# Altium PCB PCB1.PcbDoc (part 2 of 2)
Units mil, origin at the board's own origin, x right, y up, seen from the top; angles counter-clockwise.
Board outline 3040.49 x 3282.62 mil, 2 copper layers (Top Layer, Bottom Layer); 59 components, 123 nets, 376 pads, 176 vias.
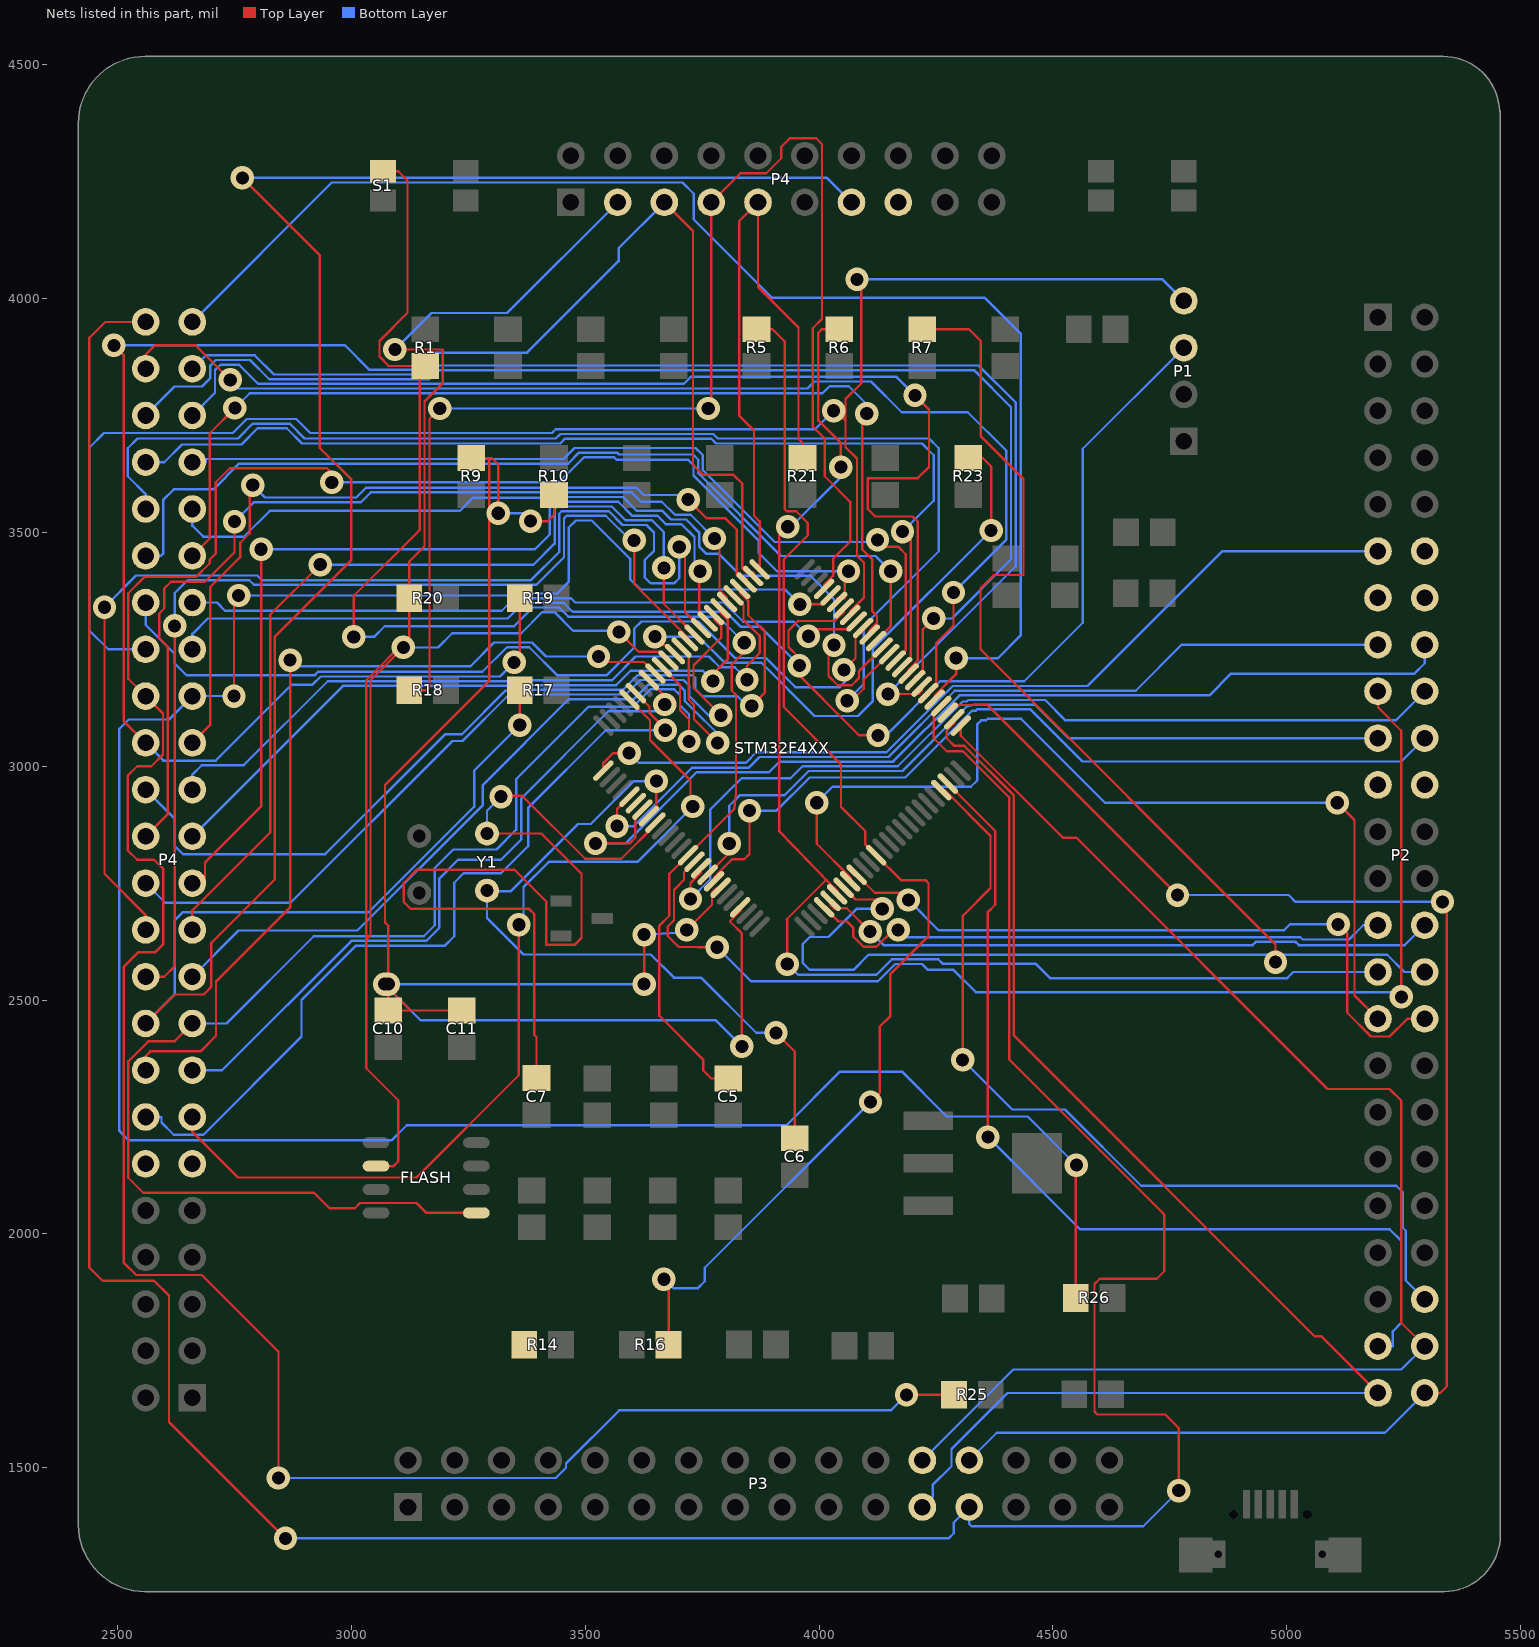
[diagram p2: the nets of this part, all layers, seen from the top]

## Via types
v1: diameter 50, hole 28, Top Layer to Bottom Layer, 172 vias
v2: diameter 177.17, hole 137.8, Top Layer to Bottom Layer, 4 vias

## Nets (pads, with @x,y where several pads share a name; then routed paths per layer and width w, separated by ;. In a path a pad name is that pad's centre, name@x,y a point inside that pad or via, vN(x,y) a via of type N, cw(c..) or ccw(c..) an arc to the next point about the centre after c; other vN are vias at no path point) (continued)
PA4: P2.27 STM32F4XX.29 | length 1266.5
  Top Layer w5: STM32F4XX.29@4010.69,2698.41 4041.26,2667.83 4060,2667.83 4072.75,2655.08 4072.75,2636.35 4095.27,2613.82 4122.92,2613.82 4159.1,2650 v1(4169.1,2650)
  Bottom Layer w5: v1(4169.1,2650) 4184.6,2634.5 5028.98,2634.5 5033.99,2629.48 5133,2629.48 5163.52,2660 P2.27@5195,2660
PA5: P2.28 STM32F4XX.30 | length 1338.3
  Top Layer w5: STM32F4XX.30@4024.61,2712.33 4024.61,2703.45 4031.74,2696.32 4059.05,2696.32 v1(4109.05,2646.32)
  Bottom Layer w5: v1(4109.05,2646.32) 4137.87,2617.5 4927.02,2617.5 4934,2624.48 5019,2624.48 5025.98,2617.5 5252.5,2617.5 P2.28@5295,2660
PA6: P2.29 R6.2 STM32F4XX.31 | length 2912
  Top Layer w5: v1(3932,2577) 3932,2674 4015.26,2757.26 4023,2749.52 ; v1(3933,3512) 3914.5,3493.5 3914.5,2861.5 4023,2749.52 ; STM32F4XX.31@4038.52,2726.25 4038.52,2734 4023,2749.52 ; R6.2@4043.43,3934.57 4006,3934.57 3998.5,3927.07 3998.5,3739 4046.65,3690.85 v1(4046.65,3639.65)
  Bottom Layer w5: v1(3932,2577) 3955,2554 4122.5,2554 4155.72,2587.22 4255,2587.22 4264.22,2578 4463,2578 4494,2547 5001,2547 5014,2560 P2.29@5195,2560 ; v1(3933,3512) 3940,3512 4046.65,3618.65 v1(4046.65,3639.65)
PA7: P2.30 R7.2 STM32F4XX.32 | length 3574.4
  Top Layer w5: STM32F4XX.32@4052.44,2740.17 4077.61,2715 4125,2715 4135,2705 v1(4135,2695) ; R7.2@4220.59,3934.57 4320,3934.57 4346,3908.57 4346,3705 4437.03,3613.97 4437.03,3409 4374,3409 4345,3380 4345,3250 4976,2619 v1(4976,2581)
  Bottom Layer w5: v1(4135,2695) 4080,2695 4020,2635 3980,2635 3965,2620 3965,2579.5 3980,2564.5 4073.45,2564.5 4106.16,2597.22 4264.82,2597.22 4265.01,2597.03 v1@4992.03,2597.03 ; v1(4976,2581) v1@4992.03,2597.03 ; P2.30@5295,2560 5252.03,2560 5215,2597.03 v1@4992.03,2597.03
PA8: P4.35 STM32F4XX.67 | length 1485.5
  Top Layer w5: v1(3977,3278) 3992,3293 4063.81,3293 STM32F4XX.67@4080.28,3309.47
  Bottom Layer w5: P4.35@2660,3350 2712.5,3350 2730,3332.5 3321.5,3332.5 3348.5,3359.5 3469,3359.5 3478.5,3350 3797,3350 3838,3309 3946,3309 v1(3977,3278)
PA9/TXD1: P1.4 P4.34 STM32F4XX.68 | length 3696.1
  Top Layer w5: v1(4031,3760) 4031,3755 4041,3755 4056.65,3739.35 ; STM32F4XX.68@4066.36,3323.39 4066.36,3331.36 4096,3361 4096,3435 4081,3450 4081,3657.69 4056.65,3682.03 4056.65,3739.35 ; v1(4081,4041) 4090.45,4031.55 4090.45,3818.95 4056.65,3785.15 4056.65,3739.35
  Bottom Layer w5: P4.34@2560,3250 2480,3250 2439.5,3290.5 2439.5,3681 2471,3712.5 2746.24,3712.5 2776.24,3742.5 2882,3742.5 2912,3712.5 3429,3712.5 3437,3720.5 3991.5,3720.5 v1(4031,3760) ; v1(4081,4041) 4734,4041 P1.4@4780,3995
PA10/RXD1: P1.3 P4.33 STM32F4XX.69 | length 3133.2
  Top Layer w5: v1(3957.75,3215.25) v1@3957.75,3217.5 ; STM32F4XX.69@4052.44,3337.31 4052.44,3329.44 4033.5,3310.5 3955,3310.5 3934.5,3290 3934.5,3255 3957.75,3231.75 v1@3957.75,3217.5 ; v1(4126,3066) 4086,3066 3934.5,3217.5 v1@3957.75,3217.5
  Bottom Layer w5: P4.33@2660,3250 2660,3283 2693,3316 3334.5,3316 3368,3349.5 3454,3349.5 3473.5,3330 3801,3330 3833,3298 3875,3298 v1(3957.75,3215.25) ; v1(4126,3066) 4143,3066 4258.5,3181.5 4438.5,3181.5 4564,3307 4564,3679 P1.3@4780,3895
PA11/USB_DM: P4.32 R25.1 STM32F4XX.70 | length 5856.4
  Top Layer w5: v1(2844,1478) 2844,1748 2680,1912 2540,1912 2512.97,1939.03 2512.97,2570.97 2544,2602 2580,2602 2598,2620 2598,2780 2578,2800 2542,2800 2522,2820 2522,2980 2542,3000 2572,3000 2597.03,3025.03 2597.03,3112.97 P4.32@2560,3150 2522.97,3187.03 2522.97,3370 2557.63,3404.66 2667.66,3404.66 2697,3434 2697,3442 2710,3455 2710,3607 2740,3637 2948,3637 2978,3607 v1(2958,3607) ; STM32F4XX.70@4038.52,3351.23 4038.52,3359 4055,3359 4055,3409 v1(4063,3417) ; v1(4187,1656) R25.1@4288.26,1656
  Bottom Layer w5: v1(2844,1478) 3437,1478 3459,1500 3459,1509 3573.01,1623.01 4154.01,1623.01 v1(4187,1656) ; v1(2958,3607) 3444,3607 3497.5,3660.5 3562,3660.5 3567,3655.5 3720,3655.5 3731.5,3644 3731.5,3621.5 3870.5,3482.5 3870.5,3456.45 3909.95,3417 v1(4063,3417)
PA12/USB_DP: P4.31 R26.1 STM32F4XX.71 | length 5343.5
  Top Layer w5: v1(2749,3150) 2749,3355 v1(2759,3365) ; v1(3959,3346) 4005.46,3346 STM32F4XX.71@4024.61,3365.15 ; R26.1@4548.63,1863 4548.63,2145.63 v1(4550,2147)
  Bottom Layer w5: v1(2749,3150) P4.31@2660,3150 2610,3100 2524,3100 2504,3080 2504,2220 2524,2200 3086,2200 3118.3,2232.3 3930.3,2232.3 4045,2347 4177,2347 4273,2251 4446,2251 v1(4550,2147) ; v1(2759,3365) 3334,3365 3338.5,3369.5 3440,3369.5 3464.5,3394 3464.5,3510 3480,3525.5 3514,3525.5 3596,3443.5 3596,3400 3618,3378 3927,3378 v1(3959,3346)
PA13/TMS: P4.7@3769.37,4205.59 R18.1 STM32F4XX.72 | length 2997
  Top Layer w5: R18.1@3123.86,3162.17 3160,3162.17 3167,3169.17 3167,3743 v1(3189,3765) ; v1(3763,3765) 3769.37,3771.37 P4.7@3769.37,4205.59 3831.78,4268 3887,4268 3919,4300 3919,4324 3937.62,4342.62 3993.78,4342.62 4006.4,4330 4006.4,3956.4 3986.34,3936.34 3986.34,3726.66 4012,3701 4012,3620 4066.71,3565.29 4066.71,3480.28 4030.1,3443.67 4030.1,3407.36 4010.69,3387.95 STM32F4XX.72@4010.69,3379.07
  Bottom Layer w5: v1(3189,3765) v1(3763,3765)
PA14/TCK: P4.9@3869.37,4205.59 R21.2 STM32F4XX.76 | length 1405.8
  Top Layer w5: STM32F4XX.76@3872.88,3420.83 3872.88,3523.53 3861,3535.41 3861,3718 3829,3750 3829,4165.22 P4.9@3869.37,4205.59 3869.37,4024.78 3956,3938.15 3956,3700.29 3964.69,3691.61 R21.2@3964.69,3658.98
PA15/TDI: P4.5@3669.37,4205.59 P4.30 R19.1 STM32F4XX.77 | length 4198.6
  Top Layer w5: v1(2492,3900) 2512.97,3879.03 2512.97,3097.03 P4.30@2560,3050 ; v1(3348,3222) 3360.08,3234.08 R19.1@3360.08,3359.02 ; P4.5@3669.37,4205.59 3730.5,4144.46 3730.5,3644.5 3752,3623 3817,3623 3835.64,3604.36 3835.64,3423.36 3844,3415 3858.96,3415 STM32F4XX.77@3858.96,3406.91
  Bottom Layer w5: v1(2492,3900) 2986.27,3900 3038.77,3847.5 3133.95,3847.5 3170.77,3884.32 3375.74,3884.32 3571.43,4080 3571.43,4107.65 P4.5@3669.37,4205.59 ; P4.30@2560,3050 2598,3012 2710,3012 2872.5,3174.5 2917,3174.5 2934.36,3191.86 3317.86,3191.86 v1(3348,3222)
PB0/TD3: R23.2 STM32F4XX.89 | length 1284.8
  Top Layer w5: v1(3649,3277) 3642,3270 3652.95,3259.05 3672.76,3259.05 STM32F4XX.89@3691.93,3239.88 ; R23.2@4319.02,3658.98 4350,3658.98 4368,3640.98 v1(4368,3504)
  Bottom Layer w5: v1(3649,3277) 3742,3277 3797.5,3221.5 3876.5,3221.5 3990.5,3107.5 4083.5,3107.5 4114.5,3138.5 4114.5,3250.5 v1(4368,3504)
PB2/BOOT1: R5.2 R16.2 STM32F4XX.37 | length 2739.6
  Top Layer w5: v1(3668.28,1903) 3678.28,1893 R16.2@3678.28,1762.74 ; R5.2@3866.26,3934.57 3900,3934.57 3926.5,3908.07 3926.5,3549.5 3931,3545 3951,3545 3976,3520 3976,3493.5 3924.5,3442 3924.5,3126.5 4047,3004 4047,2913 4099,2861 4099,2832.81 STM32F4XX.37@4122.04,2809.77 4175.31,2756.5 4227.63,2756.5 4234.13,2750 4234.13,2637.29 4152.5,2555.66 4152.5,2466 4129.5,2443 4129.5,2301.5 v1(4110,2282)
  Bottom Layer w5: v1(3668.28,1903) 3668.28,1904.72 3689.5,1883.5 3740,1883.5 3755.5,1899 3755.5,1927.5 v1(4110,2282)
PB3/TDO: P4.13@4069.37,4205.59 P4.18@2560,2450 R17.1 | length 4723.5
  Top Layer w5: P4.18@2560,2450 2622,2512 2684.37,2512 2700.66,2528.29 2700.66,2622.66 2836.5,2758.5 2836.5,3277.5 3000,3441 3000,3613 2932,3681 2932,4093 v1(2767,4258) ; v1(3360,3088) 3360.08,3088.08 R17.1@3360.08,3162.17
  Bottom Layer w5: P4.18@2560,2450 2622,2512 2622,2670 2640,2688 3037,2688 3262.35,2913.35 3262.35,2990.35 v1(3360,3088) ; v1(2767,4258) 4016.96,4258 P4.13@4069.37,4205.59
PB4/TRST: FLASH.2 P4.3@3569.37,4205.59 R20.1 STM32F4XX.90 | length 3891.5
  Top Layer w5: FLASH.2@3052.72,2145 3090,2145 3100,2155 3100,2285.9 3031.83,2354.07 3031.83,2629.83 ; v1(3093,3891) 3195,3891 3195,3818.5 3156.5,3780 3156.5,3470.5 3123.86,3437.86 R20.1@3123.86,3359.02 3123.86,3276 3031.83,3183.97 3031.83,2629.83 ; v1(3111,3254) 3041,3184 3041,2639 3031.83,2629.83 ; v1(3572,3287) 3614.5,3244.5 3662,3244.5 3678.01,3228.49 STM32F4XX.90@3678.01,3225.96
  Bottom Layer w5: v1(3093,3891) 3171,3969 3332.78,3969 P4.3@3569.37,4205.59 ; v1(3111,3254) 3185,3254 3215.5,3284.5 3363,3284.5 3408,3329.5 3434,3329.5 3474,3289.5 3569.5,3289.5 v1(3572,3287)
PB5: FLASH.5 P4.17@2660,2450 STM32F4XX.91 | length 2972.6
  Top Layer w5: P4.17@2660,2450 2622,2412 2566,2412 2522.97,2368.97 2522.97,2120 2554.97,2088 2920.2,2088 2953.2,2055 3007.2,2055 3018.2,2066 3139.5,2066 3160.5,2045 FLASH.5@3267.28,2045 ; STM32F4XX.91@3664.09,3212.04 3702.5,3173.63 3702.5,3120 3722,3100.5 v1(3722,3053)
  Bottom Layer w5: P4.17@2660,2450 2733,2450 2919.5,2636.5 3154.59,2636.5 3178.09,2660 3178.09,2782.09 3218,2822 3310,2822 3352.5,2864.5 3352.5,2972.63 3507.25,3127.39 3602.39,3127.39 3639.5,3164.5 3690,3164.5 3702.5,3152 3702.5,3130.5 3722,3111 v1(3722,3053)
PB6: P4.16@2560,2350 STM32F4XX.92 | length 1905.4
  Top Layer w5: P4.16@2560,2350 2560,2380 2570.29,2390.29 2677.29,2390.29 2710.66,2423.66 2710.66,2539.66 2869,2698 v1(2869,3227) ; v1(3528.5,3234.5) 3540,3223 3625.29,3223 STM32F4XX.92@3650.17,3198.12
  Bottom Layer w5: v1(2869,3227) 2869,3223 2878.5,3213.5 3254.02,3213.5 3305.02,3264.5 3386,3264.5 3416,3234.5 v1(3528.5,3234.5)
PB7: P4.15@2660,2350 STM32F4XX.93 | length 1513.4
  Top Layer w5: STM32F4XX.93@3636.25,3184.2 3670,3150.45 v1(3670,3132)
  Bottom Layer w5: P4.15@2660,2350 2723.5,2350 3000,2626.5 3160,2626.5 3188.09,2654.59 3188.09,2760 3228.09,2800 3320,2800 3363.16,2843.16 3363.16,2931.16 3549.39,3117.39 3655.39,3117.39 v1(3670,3132)
PB8: P4.14@2560,2250 STM32F4XX.95 | length 1763.1
  Top Layer w5: STM32F4XX.95@3608.41,3156.36 3637.49,3127.29 3637.49,3114 3674.49,3077 v1(3671,3077)
  Bottom Layer w5: P4.14@2560,2250 2594,2250 2594,2238 2620,2212 2683.5,2212 2893.37,2421.87 2893.37,2499.87 3010,2616.5 3200,2616.5 3220,2636.5 3220,2751 3240,2771 3320,2771 3377.86,2828.86 3377.86,2910.86 3544,3077 v1(3671,3077)
PB9: P4.13@2660,2250 STM32F4XX.96 | length 1985.3
  Top Layer w5: P4.13@2660,2250 2660,2218 2757.5,2120.5 3139.06,2120.5 3358,2339.44 v1(3358,2661) ; STM32F4XX.96@3594.49,3142.44 3638.5,3098.44 3638.5,3056 3725,2969.5 3725,2919 v1(3730,2914)
  Bottom Layer w5: v1(3358,2661) 3368,2671 3368,2741.58 3421.92,2795.5 3611.5,2795.5 v1(3730,2914)
PB10: P2.44 STM32F4XX.47 | length 1956.2
  Top Layer w5: STM32F4XX.47@4261.24,2948.96 4268.54,2948.96 4366.5,2851 4366.5,2739.5 4307,2680 v1(4307,2372)
  Bottom Layer w5: v1(4307,2372) 4412.86,2266.14 4525.86,2266.14 4689,2103 5234,2103 5247.97,2089.03 5247.97,2012.97 5254.33,2006.61 5254.33,1900.67 P2.44@5295,1860
PB11: P2.45 STM32F4XX.48 | length 2044.1
  Top Layer w5: STM32F4XX.48@4275.15,2962.88 4376.5,2861.53 4376.5,2703.67 4361,2688.17 v1(4361,2207)
  Bottom Layer w5: v1(4361,2207) 4558,2010 5220,2010 5244.33,1985.67 5244.33,1809.33 5226.9,1791.9 5226.9,1760 P2.45@5195,1760
PB12: P2.46 P3.24 STM32F4XX.51 | length 3007.4
  Top Layer w5: STM32F4XX.51@4302.99,3086.76 4302.99,3065.34 4521.28,2847.06 4550.12,2847.06 5087.17,2310 5220,2310 5245,2285 5245,1810 P2.46@5295,1760
  Bottom Layer w5: P3.24@4221,1516 4415,1710 5245,1710 P2.46@5295,1760
PB13: P2.47 P3.23 STM32F4XX.52 | length 2961.2
  Top Layer w5: STM32F4XX.52@4289.07,3100.68 4289.07,3091.8 4273,3075.73 4273,3060 4289.45,3043.55 4310.45,3043.55 4416.5,2937.5 4416.5,2424.46 5060,1780.96 5074.04,1780.96 P2.47@5195,1660
  Bottom Layer w5: P3.23@4221,1416 4242.74,1437.74 4242.74,1462.88 4283,1503.14 4283,1540 4403,1660 P2.47@5195,1660
PB14: P2.48 P3.26 STM32F4XX.53 | length 3365.2
  Top Layer w5: STM32F4XX.53@4275.15,3114.6 4291.55,3131 4360,3131 v1(4766.5,2724.5) ; P2.48@5295,1660 5328,1660 5342.03,1674.03 5342.03,2700.97 v1(5333,2710)
  Bottom Layer w5: P3.26@4321,1516 4380,1575 5210,1575 P2.48@5295,1660 ; v1(4766.5,2724.5) 5004.36,2724.5 5018.86,2710 v1(5333,2710)
PB15: P3.25 P4.48 STM32F4XX.54 | length 7162.1
  Top Layer w5: P4.48@2560,3950 2473.6,3950 2439.5,3915.9 2439.5,1928.5 2468,1900 2578,1900 2610,1868 2610,1598 v1(2859.03,1348.97) ; STM32F4XX.54@4261.24,3128.52 4245,3112.28 4245,3060 4273,3032 4307.86,3032 4406.5,2933.36 4406.5,2373 4738,2041.5 4738,1920 4722,1904 4600,1904 4589,1893 4589,1620 4595,1614 4740,1614 4769,1585 v1(4769,1451)
  Bottom Layer w5: v1(2859.03,1348.97) 4277,1348.97 4288.03,1360 4288.03,1383.03 P3.25@4321,1416 4321,1380 4326,1375 4693,1375 v1(4769,1451)
PC0: P2.17 STM32F4XX.15 | length 2509.4
  Top Layer w5: STM32F4XX.15@3733.69,2795.85 3711.35,2773.51 3711.35,2757.07 3689.83,2735.55 3689.83,2670.5 3676.5,2657.17 3676.5,2637 3700,2613.5 3741.5,2613.5 3742,2613 v1(3782,2613) ; P2.17@5195,3160 5195,3126 5245,3076 v1(5245,2507)
  Bottom Layer w5: v1(3782,2613) 3855,2540 4125.5,2540 4162.72,2577.22 4220.28,2577.22 4233,2564.5 4287.5,2564.5 4335,2517 5235,2517 v1(5245,2507)
PC1: P2.18 STM32F4XX.16 | length 1952.5
  Top Layer w5: v1(3725,2716) 3725,2750.44 3747.61,2773.05 STM32F4XX.16@3747.61,2781.93
  Bottom Layer w5: v1(3725,2716) 3767.5,2758.5 3767.5,2907.5 3834.33,2974.33 3939.02,2974.33 3964.55,2999.86 4168.36,2999.86 4307,3138.5 4315.76,3138.5 4318.76,3141.5 4483.5,3141.5 4527,3098 5233,3098 P2.18@5295,3160
PC2: P2.19 STM32F4XX.17 | length 1673.7
  Top Layer w5: STM32F4XX.17@3761.53,2768.01 3810,2816.48 3810,2832.47 v1(3808,2834.48)
  Bottom Layer w5: v1(3808,2834.48) 3808,2915.63 3830,2937.63 3925.63,2937.63 3977.86,2989.86 4178.36,2989.86 4317,3128.5 4330.5,3131.5 4462,3131.5 4533.5,3060 P2.19@5195,3060
PC3: P2.20 STM32F4XX.18 | length 1797.9
  Top Layer w5: STM32F4XX.18@3775.45,2754.09 3775.45,2762.45 3814.13,2801.13 3840,2801.13 3851.13,2812.27 v1(3851.13,2905.13)
  Bottom Layer w5: v1(3851.13,2905.13) 3909.12,2905.13 3979.92,2975.94 4184.44,2975.94 4327,3118.5 4335,3118.5 4338,3121.5 4452,3121.5 4563.5,3010 5245,3010 P2.20@5295,3060
PC4: P2.31 STM32F4XX.33 | length 2027.5
  Top Layer w5: v1(3995,2922) 3995,2834.33 4066.36,2762.96 STM32F4XX.33@4066.36,2754.09 ; v1(5108,2922) 5145,2885 5145,2510 P2.31@5195,2460
  Bottom Layer w5: v1(3995,2922) 4028.94,2955.94 4324.44,2955.94 4338.5,2970 4338.5,3090 4347,3098.5 4357.5,3098.5 4360.5,3101.5 4432,3101.5 4611.5,2922 v1(5108,2922)
PC5: P2.32 STM32F4XX.34 | length 1483.7
  Top Layer w5: STM32F4XX.34@4080.28,2768.01 4119,2729.29 4175.71,2729.29 v1(4191,2714) ; v1(5110,2662) 5129.28,2642.72 5129.28,2472.72 5180,2422 5220,2422 5258,2460 P2.32@5295,2460
  Bottom Layer w5: v1(4191,2714) 4255.5,2649.5 4994.38,2649.5 5006.88,2662 v1(5110,2662)
PC6: P4.39 STM32F4XX.63 | length 1896.4
  Top Layer w5: v1(4032,3259) 4032,3255 4020,3243 4020,3193 4040,3173 4070,3173 4085.5,3188.5 4085.5,3203.34 STM32F4XX.63@4135.96,3253.8
  Bottom Layer w5: P4.39@2660,3550 2660,3514 2683.5,3490.5 2770,3490.5 2825.5,3546 3231.65,3546 3260,3574.35 3413.35,3574.35 3414.5,3575.5 3580.5,3575.5 3610,3546 3665.01,3546 3683.51,3527.5 3716,3527.5 3743.5,3500 3743.5,3470 3759.5,3454 3786,3454 3833,3407 3982,3407 4032,3357 v1(4032,3259)
PC7: P4.38 STM32F4XX.64 | length 2035.5
  Top Layer w5: STM32F4XX.64@4122.04,3267.71 4153,3298.67 v1(4153,3417)
  Bottom Layer w5: P4.38@2560,3450 2593,3450 2598,3455 2598,3570 2620,3592 2705,3592 2760.01,3647.01 3463.51,3647.01 3487,3670.5 3567.99,3670.5 3572,3666.49 3730.17,3666.49 3741.5,3655.17 3741.5,3626.67 3918.61,3449.57 4120.43,3449.57 v1(4153,3417)
PC8: P4.37 STM32F4XX.65 | length 2256.2
  Top Layer w5: P4.37@2660,3450 2697.03,3487.03 2697.03,3712.03 v1(2751,3766) ; v1(4102,3754) 4092,3744 4092,3464 4114,3442 4114,3331 4124,3321 4124,3306.39 4108.12,3290.51 STM32F4XX.65@4108.12,3281.63
  Bottom Layer w5: v1(2751,3766) 2782.5,3797.5 4007.5,3797.5 4022.5,3812.5 4063.5,3812.5 4102,3774 v1(4102,3754)
PC9: P4.36 STM32F4XX.66 | length 1924.4
  Top Layer w5: v1(4053,3206) 4078,3231 4078,3280 4094.2,3288 STM32F4XX.66@4094.2,3295.55
  Bottom Layer w5: P4.36@2560,3350 2560,3302.37 2622,3240.37 2622,3220 2647.78,3194.22 2921,3194.22 2928.64,3201.86 3280,3201.86 3332.64,3254.5 3380.5,3254.5 3440.78,3194.22 3545.22,3194.22 3605,3254 3605,3294.5 3620,3309.5 3742,3309.5 3820,3231.5 3886.5,3231.5 3948.88,3169.12 4044.12,3169.12 4060,3185 4060,3199 v1(4053,3206)
PC10: P4.29 STM32F4XX.78 | length 1825.5
  Top Layer w5: P4.29@2660,3050 2698,3088 2698,3382.66 2762.5,3447.16 2762.5,3478 2782.5,3498 2782.5,3594.5 v1(2789,3601) ; v1(3720,3570) 3760,3530 3800,3530 3824,3506 3824,3409 3832,3401 3845.04,3401 STM32F4XX.78@3845.04,3392.99
  Bottom Layer w5: v1(2789,3601) 2815.5,3574.5 3010.5,3574.5 3031.5,3595.5 3609.5,3595.5 3625,3580 3710,3580 v1(3720,3570)
PC11: P4.28 STM32F4XX.79 | length 1869.9
  Top Layer w5: STM32F4XX.79@3831.13,3379.07 3831.13,3370.87 3848.5,3353.5 3848.5,3322.88 3883.5,3287.88 3883.5,3156.5 v1(3856,3129)
  Bottom Layer w5: P4.28@2560,2950 2622,2888 2622,2830 2640,2812 2943.86,2812 3200,3068.14 3236.02,3068.14 3329.74,3161.86 3377.52,3161.86 3379.16,3163.5 3581,3163.5 3612,3194.5 3730,3194.5 3735.13,3189.37 3735.13,3165.37 3751,3149.5 3825.5,3149.5 3846,3129 v1(3856,3129)
PC12: P4.27 STM32F4XX.80 | length 1558
  Top Layer w5: STM32F4XX.80@3817.21,3365.15 3838.5,3343.86 3838.5,3312.88 3873.5,3277.88 3873.5,3242.5 3846,3215 v1(3846,3185)
  Bottom Layer w5: P4.27@2660,2950 2660,2982 2680,3002 2769.53,3002 2949.39,3181.86 3355.88,3181.86 3357.52,3183.5 3556.5,3183.5 3607.5,3234.5 3764.5,3234.5 3787.5,3211.5 3819.5,3211.5 v1(3846,3185)
PC13: P2.16 STM32F4XX.7 | length 2128.9
  Top Layer w5: v1(3522,2835) 3594.89,2835 3606.76,2846.87 3606.76,2891.62 STM32F4XX.7@3622.33,2907.2
  Bottom Layer w5: v1(3522,2835) 3586,2835 3738,2987 3893.08,2987 3915.94,3009.86 4158.36,3009.86 4300,3151.5 4834.56,3151.5 4881.06,3198 5273,3198 5295,3220 P2.16@5295,3260
PC14: C6.2 STM32F4XX.8 Y1.2 | length 1560.9
  Top Layer w5: STM32F4XX.8@3636.25,2893.28 3652,2909.03 v1(3652,2968) ; v1(3908,2430) 3948,2390 C6.2@3948,2204.37
  Bottom Layer w5: Y1.2@3290,2733.98 Y1.2@3290,2733 ; v1(3652,2968) 3603.15,2968 3511.65,2876.5 3484.75,2876.5 3341.25,2733 Y1.2@3290,2733 ; v1(3908,2430) 3865.79,2430 3747.79,2548 3689.5,2548 3640,2597.5 3368,2597.5 3290,2675.5 Y1.2@3290,2733
PC15: C7.2 STM32F4XX.9 Y1.1 | length 2089.9
  Top Layer w5: Y1.1@3290,2856.02 3405.98,2856.02 3492,2770 3492,2633 3477,2618 3417,2618 3417,2710.38 3348.38,2779 3140,2779 3111.91,2750.91 3111.91,2710 3126.91,2695 3380,2695 3391,2684 3391,2425.91 3395.91,2421 C7.2@3395.91,2333.11 ; v1(3320,2935) 3322,2937 3365,2937 3500,2802 3577,2802 3650.17,2875.17 STM32F4XX.9@3650.17,2879.36
  Bottom Layer w5: Y1.1@3290,2856.02 3290,2905 v1(3320,2935)
PD0: P4.26 STM32F4XX.81 | length 2048.8
  Top Layer w5: P4.26@2560,2850 2607.03,2897.03 2607.03,3255.97 2589,3274 2589,3326.63 2600,3337.63 2600,3380 2614.66,3394.66 2687.03,3394.66 2750,3457.63 v1(2750,3523) ; v1(3776,3487) 3787,3476 3787,3376.39 3803.29,3360.11 STM32F4XX.81@3803.29,3351.23
  Bottom Layer w5: v1(2750,3523) 2791.5,3564.5 3020.5,3564.5 3041.5,3585.5 3599.5,3585.5 3619.5,3565.5 3663.8,3565.5 3691.8,3537.5 3725.5,3537.5 v1(3776,3487)
PD1: P4.25 STM32F4XX.82 | length 1444.2
  Top Layer w5: v1(3773,3182) 3773,3197 3805,3229 3805,3312.8 3789.37,3328.44 STM32F4XX.82@3789.37,3337.31
  Bottom Layer w5: P4.25@2660,2850 2981.86,3171.86 3365.88,3171.86 3367.52,3173.5 3566.5,3173.5 3597.5,3204.5 3750.5,3204.5 v1(3773,3182)
PD2: P4.24 STM32F4XX.83 | length 1758.6
  Top Layer w5: STM32F4XX.83@3775.45,3323.39 3775.45,3314.51 3791,3298.96 3791,3275 3731.35,3215.35 3731.35,3167.65 v1(3790,3109)
  Bottom Layer w5: P4.24@2560,2750 2602,2708 2869.99,2708 3216,3054.01 3237.53,3054.01 3335.38,3151.86 3387.52,3151.86 3389.16,3153.5 3586.5,3153.5 3617.5,3184.5 3710,3184.5 3722.5,3172 3722.5,3150.26 3763.76,3109 v1(3790,3109)
PD3: P4.23 STM32F4XX.84 | length 2021.6
  Top Layer w5: P4.23@2660,2750 2687.03,2750 2687.03,2794.03 2807,2914 v1(2807,3464) ; v1(3745.77,3417) 3745.77,3408.77 3744,3407 3744,3327 STM32F4XX.84@3761.53,3309.47
  Bottom Layer w5: v1(2807,3464) 3392.5,3464 3424.5,3496 3424.5,3560 3430,3565.5 3570.41,3565.5 3600,3535.91 3654.01,3535.91 3672.42,3517.5 3706,3517.5 3733.5,3490 3733.5,3429.27 v1(3745.77,3417)
PD4: P4.22 STM32F4XX.85 | length 2514.6
  Top Layer w5: v1(2472,3340) 2472,2770 2560,2682 P4.22@2560,2650 ; v1(3701,3469) 3710,3469 3713.27,3465.73 3713.27,3329.9 STM32F4XX.85@3747.61,3295.56
  Bottom Layer w5: v1(2472,3340) 2539.73,3407.73 2798.77,3407.73 2808.5,3398 3384.22,3398 3444.5,3458.28 3444.5,3540 3450,3545.5 3550.41,3545.5 3580,3515.91 3631.07,3515.91 3646.98,3500 3646.98,3460.5 3626.98,3440.5 3626.98,3404.02 3640,3391 3690,3391 3701,3402 v1(3701,3469)
PD5: P4.21 STM32F4XX.86 | length 1992.8
  Top Layer w5: P4.21@2660,2650 2660,2692 2826.5,2858.5 2826.5,3324.14 v1(2933.36,3431) ; v1(3668,3424) 3668,3347.32 STM32F4XX.86@3733.69,3281.63
  Bottom Layer w5: v1(2933.36,3431) 3389.5,3431 3434.5,3476 3434.5,3550 3440,3555.5 3556.69,3555.5 3586.28,3525.91 3642.8,3525.91 3668,3500.72 v1(3668,3424)
PD6: P4.20@2560,2550 STM32F4XX.87 | length 2261.7
  Top Layer w5: P4.20@2560,2550 2600,2550 2622,2572 v1(2622,3300) ; v1(3604.48,3483) 3604.48,3390.03 3719.77,3274.75 STM32F4XX.87@3719.77,3267.71
  Bottom Layer w5: v1(2622,3300) 2622,3370 2649.73,3397.73 2781.77,3397.73 2791.5,3388 3395.66,3388 3454.5,3446.84 3454.5,3530 3460,3535.5 3544,3535.5 3596.5,3483 v1(3604.48,3483)
PD7: P4.19@2660,2550 STM32F4XX.88 | length 1746.4
  Top Layer w5: STM32F4XX.88@3705.85,3253.8 3722,3237.65 3722,3229 3721.35,3228.35 3721.35,3141.97 3732.6,3130.72 3732.6,3100.4 v1(3783,3050)
  Bottom Layer w5: P4.19@2660,2550 2758.75,2648.75 3012.59,2648.75 3281.21,2917.37 3281.21,2960 3464.71,3143.5 3604,3143.5 3635,3174.5 3700,3174.5 3712.5,3162 3712.5,3140 3802.5,3050 v1(3783,3050)
PD8: P4.47 STM32F4XX.55 | length 2971.6
  Top Layer w5: STM32F4XX.55@4247.32,3142.44 4247.32,3151.32 4293,3197 v1(4293,3231)
  Bottom Layer w5: P4.47@2660,3950 2958,4248 3708,4248 3732,4224 3732,4169 3899,4002 4354,4002 4431,3925 4431,3279.42 4382.58,3231 v1(4293,3231)
PD9: P4.46 STM32F4XX.56 | length 2575.4
  Top Layer w5: P4.46@2560,3850 2560,3880 2580,3900 2667,3900 v1(2741,3826) ; STM32F4XX.56@4233.4,3156.36 4250.5,3173.46 4250.5,3263.5 4287.5,3300.5 v1(4287.5,3371.5)
  Bottom Layer w5: v1(2741,3826) 2741,3820 2753.5,3807.5 3975,3807.5 3990,3822.5 4111.19,3822.5 4176.66,3757.04 4317.9,3757.04 4400.5,3674.43 4400.5,3484.5 v1(4287.5,3371.5)
PD10: P4.45 STM32F4XX.57 | length 2651.1
  Top Layer w5: v1(4147,3154.27) 4212.34,3154.27 4219.48,3161.4 STM32F4XX.57@4219.48,3170.28
  Bottom Layer w5: P4.45@2660,3850 2688.5,3878.5 2793.5,3878.5 2834.5,3837.5 3138.5,3837.5 3158,3857 4341,3857 4420.5,3777.5 4420.5,3427.77 v1(4147,3154.27)
PD11: P4.44 STM32F4XX.58 | length 2667.4
  Top Layer w5: STM32F4XX.58@4205.56,3184.2 4205.56,3191 4222,3200 4222,3293 v1(4245,3316)
  Bottom Layer w5: P4.44@2560,3750 2622,3812 2680.5,3812 2698.5,3830 2698.5,3857 2710,3868.5 2783.5,3868.5 2824.5,3827.5 3166.33,3827.5 3185.83,3847 4331,3847 4410.5,3767.5 4410.5,3442.5 4284,3316 v1(4245,3316)
PD12: P4.43 STM32F4XX.59 | length 2481.4
  Top Layer w5: STM32F4XX.59@4191.64,3198.12 4191.64,3206.64 4211,3226 4211,3523 4200,3534 4120,3534 4104,3550 4104,3616 4211,3616 4235,3640 4235,3763 v1(4205,3793)
  Bottom Layer w5: P4.43@2660,3750 2708.5,3798.5 2708.5,3847 2720,3858.5 2760,3858.5 2801,3817.5 3710.5,3817.5 3725.5,3832.5 4165.5,3832.5 v1(4205,3793)
PD13: P4.42 STM32F4XX.60 | length 2242.9
  Top Layer w5: STM32F4XX.60@4177.72,3212.04 4177.72,3216.72 4196,3235 4196,3484 v1(4178.5,3501.5)
  Bottom Layer w5: P4.42@2560,3650 2600,3650 2638,3688 2764.78,3688 2799.28,3722.5 2862,3722.5 2894.5,3690 3446.5,3690 3457,3700.5 3769.4,3700.5 3779.9,3690 4220,3690 4245,3665 4245,3568 v1(4178.5,3501.5)
PD14: P4.41 STM32F4XX.61 | length 1895.2
  Top Layer w5: v1(4125,3484) 4140,3469 4169.84,3469 4185.5,3453.34 4185.5,3247.66 STM32F4XX.61@4163.8,3225.96
  Bottom Layer w5: P4.41@2660,3650 2688.5,3650 2688.5,3657.01 3453.51,3657.01 3477,3680.5 3735.99,3680.5 3751.5,3664.99 3751.5,3633.03 3905.03,3479.5 4120.5,3479.5 v1(4125,3484)
PD15: P4.40 STM32F4XX.62 | length 2695.2
  Top Layer w5: v1(4060,3140) 4070,3140 4095.5,3165.5 4095.5,3185.5 STM32F4XX.62@4149.88,3239.88
  Bottom Layer w5: P4.40@2560,3550 2560,3582 2522,3620 2522,3680 2542.67,3700.67 2757.45,3700.67 2789.28,3732.5 2868.17,3732.5 2900,3700.67 3437.17,3700.67 3447,3710.5 3773.58,3710.5 3783.4,3700.67 4235.13,3700.67 4255.81,3680 4255.81,3459.87 4095.71,3299.77 4095.71,3175.71 v1(4060,3140)
PE0: P4.12@2560,2150
PE1: P4.11@2660,2150
PE2: P2.11 STM32F4XX.1 | length 1877
  Top Layer w5: STM32F4XX.1@3538.82,2990.72 3538.82,3006.82 3560,3028 v1(3594,3028)
  Bottom Layer w5: v1(3594,3028) 3614.5,3007.5 3843.45,3007.5 3865.81,3029.86 4144.12,3029.86 4285.76,3171.5 4574,3171.5 4862.5,3460 P2.11@5195,3460
PE3: P2.12
PE4: P2.13
PE5: P2.14
PE6: P2.15 STM32F4XX.5 | length 1861.7
  Top Layer w5: v1(3568,2872) 3568,2908.55 STM32F4XX.5@3594.49,2935.04
  Bottom Layer w5: v1(3568,2872) 3603.9,2872 3728.9,2997 3850,2997 3872.86,3019.86 4148.36,3019.86 4290,3161.5 4677,3161.5 4775.5,3260 P2.15@5195,3260
RET: P4.15@4169.37,4205.59
RST: C5.2 R1.1 S1.2 STM32F4XX.14 | length 3193.6
  Top Layer w5: v1(3005.09,3276.5) 3005.09,3364.31 3146.5,3505.72 R1.1@3146.5,3855.83 ; S1.2@3067.32,4272.24 3100,4272.24 3120,4252.24 3120,3969.51 3060,3909.51 3060,3875.83 3080,3855.83 R1.1@3146.5,3855.83 ; R1.1@3157.6,3855.83 R1.1@3146.5,3855.83 ; C5.2@3806,2332.37 3769.63,2332.37 3752,2350 3752,2373 3658.5,2466.5 3658.5,2659.17 3679.83,2680.5 3679.83,2769.82 STM32F4XX.14@3719.77,2809.77 3818.63,2908.63 3822.5,2941.5 3822.5,3152.5 3813.5,3161.5 3813.5,3217.5 3840,3244 v1(3840,3264)
  Bottom Layer w5: v1(3005.09,3276.5) 3048.5,3276.5 3071.5,3299.5 3348,3299.5 3388,3339.5 3444,3339.5 3464,3319.5 3784.5,3319.5 v1(3840,3264)
T_PEN: R14.1
VBAT: STM32F4XX.6
VDDA: C10.2 C11.2 R9.2 R10.1 STM32F4XX.19 STM32F4XX.22 | length 3868.9
  Top Layer w5: v1(3071,2534) v1@3078.86,2526.14 ; C11.2@3236.34,2477.87 3127.13,2477.87 ; R9.2@3256.02,3658.98 3290,3658.98 ; v1(3314,3541) 3314,3644.98 3300,3658.98 3290,3658.98 ; v1(3383,3524) 3420,3524 3433.19,3537.19 R10.1@3433.19,3580.24 ; v1(3626,2534) v1(3626,2640) ; v1(3717,2650) 3771,2704 3771,2730 3779,2738 3789.37,2738 STM32F4XX.19@3789.37,2740.17 ; STM32F4XX.22@3831.13,2698.41 3831.13,2690.13 3810,2669 3810,2667.62 3835,2642.62 v1(3835,2401) ; v1@3078.86,2526.14 v1(3078.86,2534) 3078.86,2658.91 3071.91,2665.86 3071.91,2960.05 3295.02,3183.16 3295.02,3653.96 3290,3658.98 ; v1@3078.86,2526.14 3127.13,2477.87 ; v1@3078.86,2526.14 C10.2@3078.86,2477.87 3127.13,2477.87
  Bottom Layer w5: v1(3071,2534) 3148.5,2456.5 3779.5,2456.5 v1(3835,2401) ; v1(3078.86,2534) v1(3626,2534) ; v1(3314,3541) 3366,3541 v1(3383,3524) ; v1(3626,2640) 3717,2645 v1(3717,2650)
VREF+: P2.22
VREF-: P2.21
pads on no net: P3.2 P3.29 P4.11@3969.37,4205.59 P4.17@4269.37,4205.59 P4.19@4369.37,4205.59 STM32F4XX.49 STM32F4XX.73 STM32F4XX.97 STM32F4XX.98 USB. USB.4 USB.6 VR1.4
copper on no net:
  other v2: 5335,1355 2559.06,1377.95 2560,4375 5333,4397

## Polygon pours and split planes (outlines as drawn)
no net on Top Layer "Mechanical 1-No Net" (solid, pour order 0): 2421.28,4512.77 2419,4510.49 2419,1240.18 5451.56,1240.18 5451.74,1240 5451.74,4512.77

## Silkscreen, mask and mechanical layers (free items; w line width, h text height)
Top Overlay:
  text "5V" at 5155,4105 h40
  text "5V" at 5260,4105 h40
  text "5V" at 5155,4045 h40
  text "5V" at 5260,4045 h40
  text "PB15 PD8" at 2730,3930 h40
  text "PD9 PD10" at 2725,3830 h40
  text "3V3 3V3" at 4850,3735 h40
  text "PD11 PD12" at 2725,3730 h40
  text "3V3 3V3" at 4850,3640 h40
  text "D13 PD14" at 2725,3630 h40
  text "GND GND" at 4850,3540 h40
  text "PD15 PC6" at 2725,3525 h40
  text "PE2 PE3" at 4850,3440 h40
  text "PC7 PC8" at 2725,3430 h40
  text "PE4 PE5" at 4850,3335 h40
  text "PC9 PA8" at 2725,3325 h40
  text "PE6 PC13" at 4815,3240 h40
  text "PA9 PA10" at 2725,3230 h40
  text "PC0 PC1" at 4855,3135 h40
  text "PA11 PA12" at 2725,3130 h40
  text "PC2 PC3" at 4850,3035 h40
  text "PA15 PC10" at 2725,3030 h40
  text "VE- VE+" at 4850,2940 h40
  text "PC11 PC12" at 2725,2925 h40
  text "PA0 PA1" at 4860,2840 h40
  text "PD0 PD1" at 2725,2830 h40
  text "PA2 PA3" at 4850,2735 h40
  text "PD2 PD3" at 2725,2720 h40
  text "PA4 PA5" at 4850,2635 h40
  text "PD4 PD5" at 2725,2620 h40
  text "PA6 PA7" at 4850,2540 h40
  text "PD6 PD7" at 2725,2520 h40
  text "PC4 PC5" at 4850,2440 h40
  text "PB3 PB5" at 2725,2420 h40
  text "PB0 PB1" at 4860,2340 h40
  text "PB6 PB7" at 2725,2320 h40
  text "PE7 PE8" at 4850,2245 h40
  text "PB8 PB9" at 2725,2220 h40
  text "PE9 PE10" at 4825,2140 h40
  text "PE0 PE1" at 2725,2120 h40
  text "PE11 PE12" at 4800,2040 h40
  text "GND GND" at 2725,2025 h40
  text "PE13 PE14" at 4800,1940 h40
  text "GND GND" at 2725,1920 h40
  text "PE15 PB10" at 4790,1840 h40
  text "PB11 PB12" at 4790,1740 h40
  text "PB13 PB14" at 4785,1640 h40
  text "TFT" at 3879,1610 h40
  text "3V3" at 2495,1545 h40
  text "3V3" at 2630,1545 h40
  text "3V3" at 2495,1490 h40
  text "3V3" at 2630,1490 h40
Mechanical 1:
  lines w10: 5335,1240.18 ccw(c5335,1356.92) 5451.74,1356.92 ; 5336,1240.18 2559.06,1240.18 cw(c2559.06,1377.95) 2421.28,1377.95 2421.28,4375 cw(c2559.06,4375) 2559.06,4512.77 5334.26,4512.77 cw(c5334.26,4397) 5450.03,4397 ; 5451.74,1357 5451.74,4397

## Text inside footprints (layer, text, board x,y; h text height)
P3: Top Overlay "32" at 4681,1496 h40; Top Overlay "31" at 4681,1396 h40; Top Overlay "1" at 3021,1396 h40; Top Overlay "2" at 3021,1496 h40
P4: Top Overlay "2" at 3369.37,4285.59 h40; Top Overlay "1" at 3369.37,4185.59 h40; Top Overlay "19" at 4429.37,4185.59 h40; Top Overlay "20" at 4429.37,4285.59 h40
USB: Top Overlay "+" at 4835.08,1427.52 h40